# Altium PCB PCB_Project_Board_2.PcbDoc
Units mil, origin at the board's own origin, x right, y up, seen from the top; angles counter-clockwise.
Board outline 3900 x 3905 mil, 2 copper layers (Top Layer, Bottom Layer); 46 components, 29 nets, 148 pads, 20 vias.
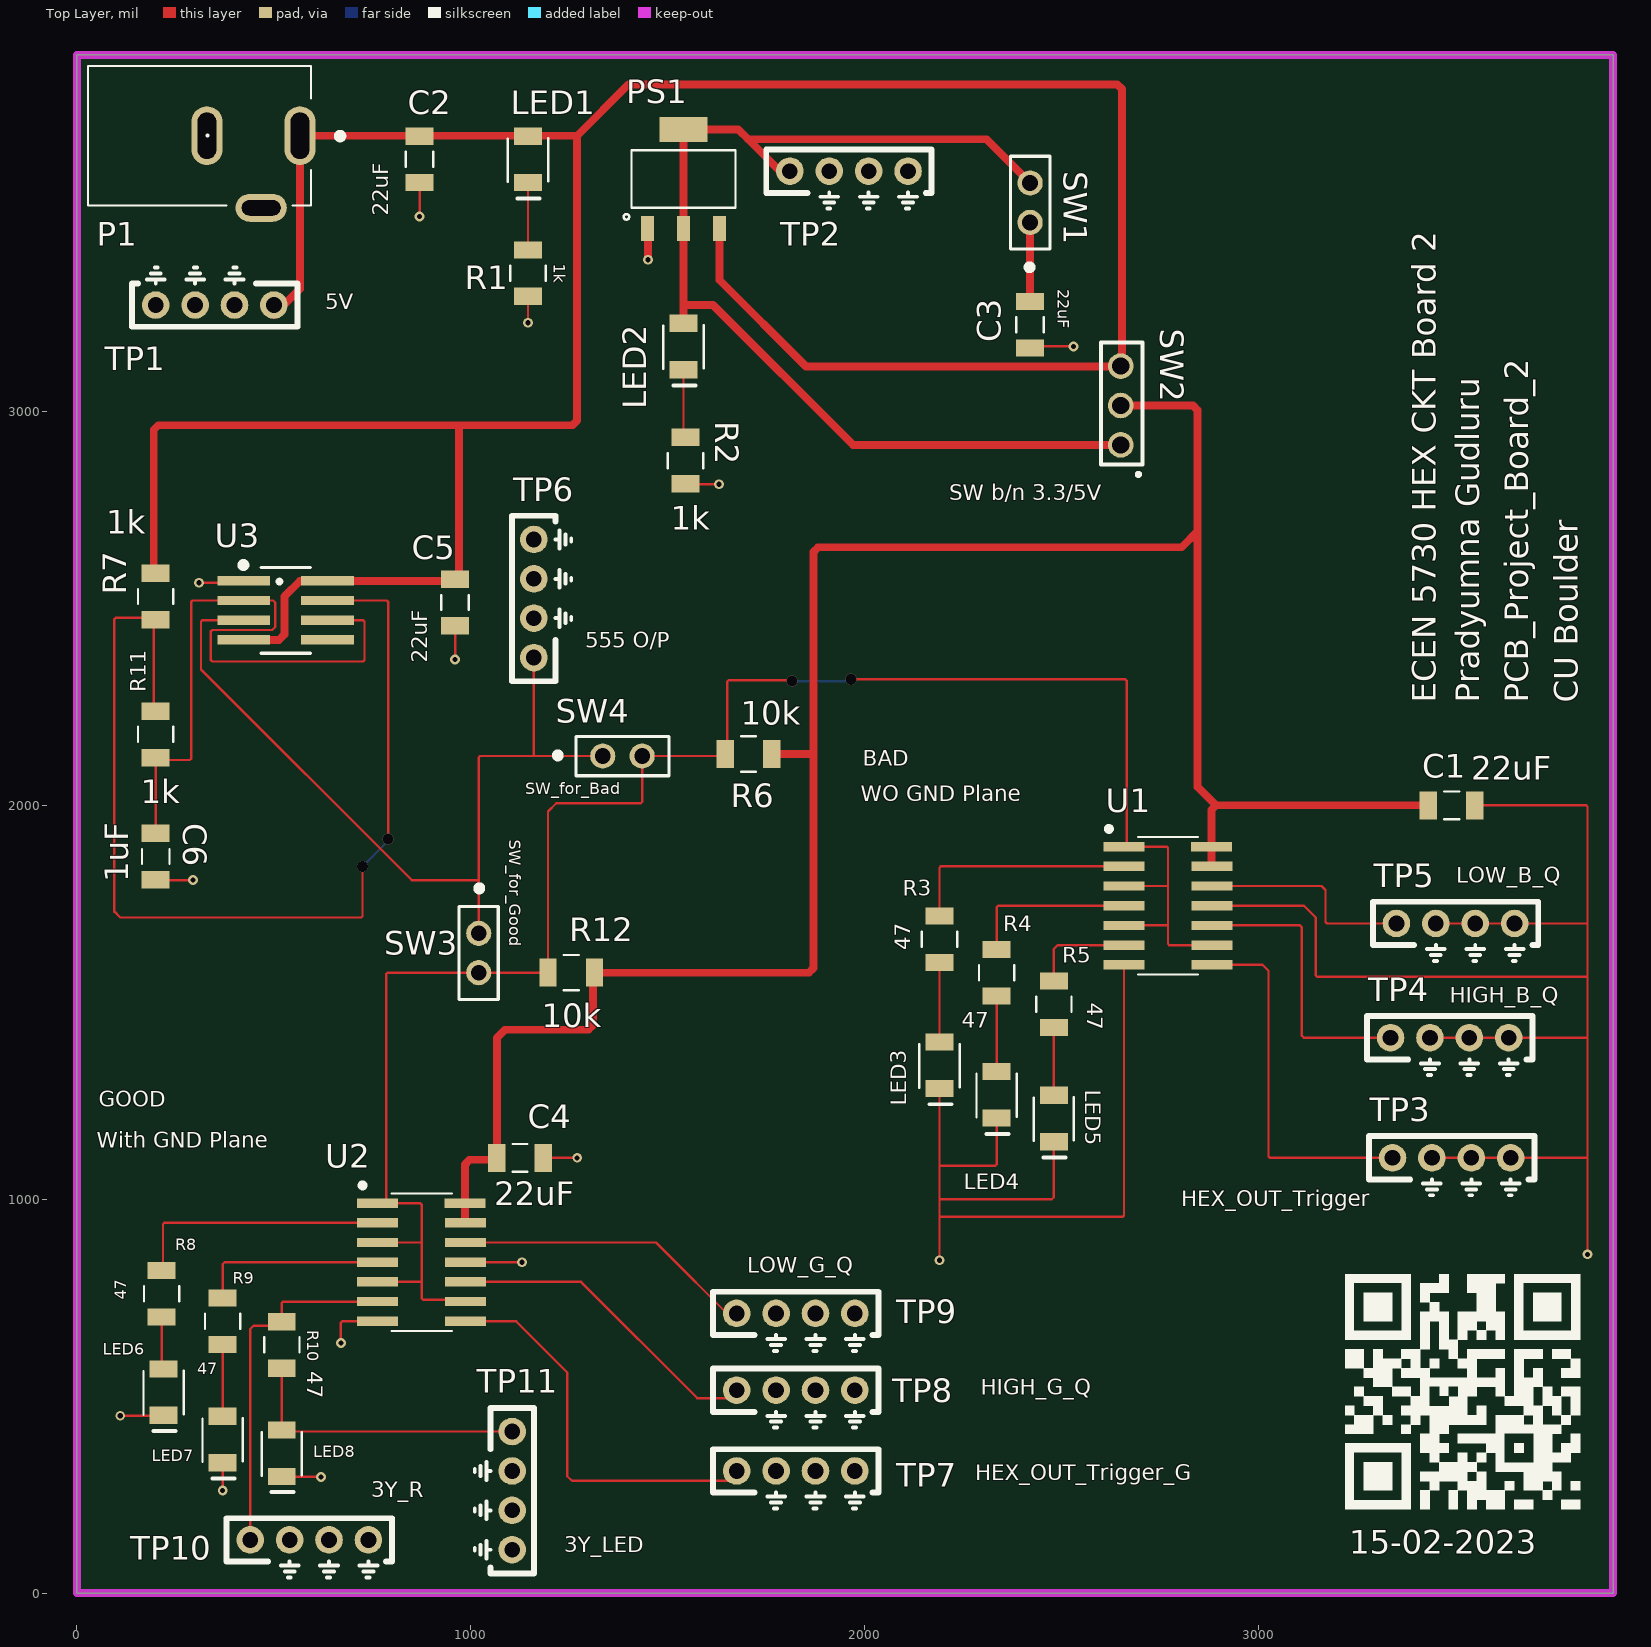
[diagram p0: Top Layer view]
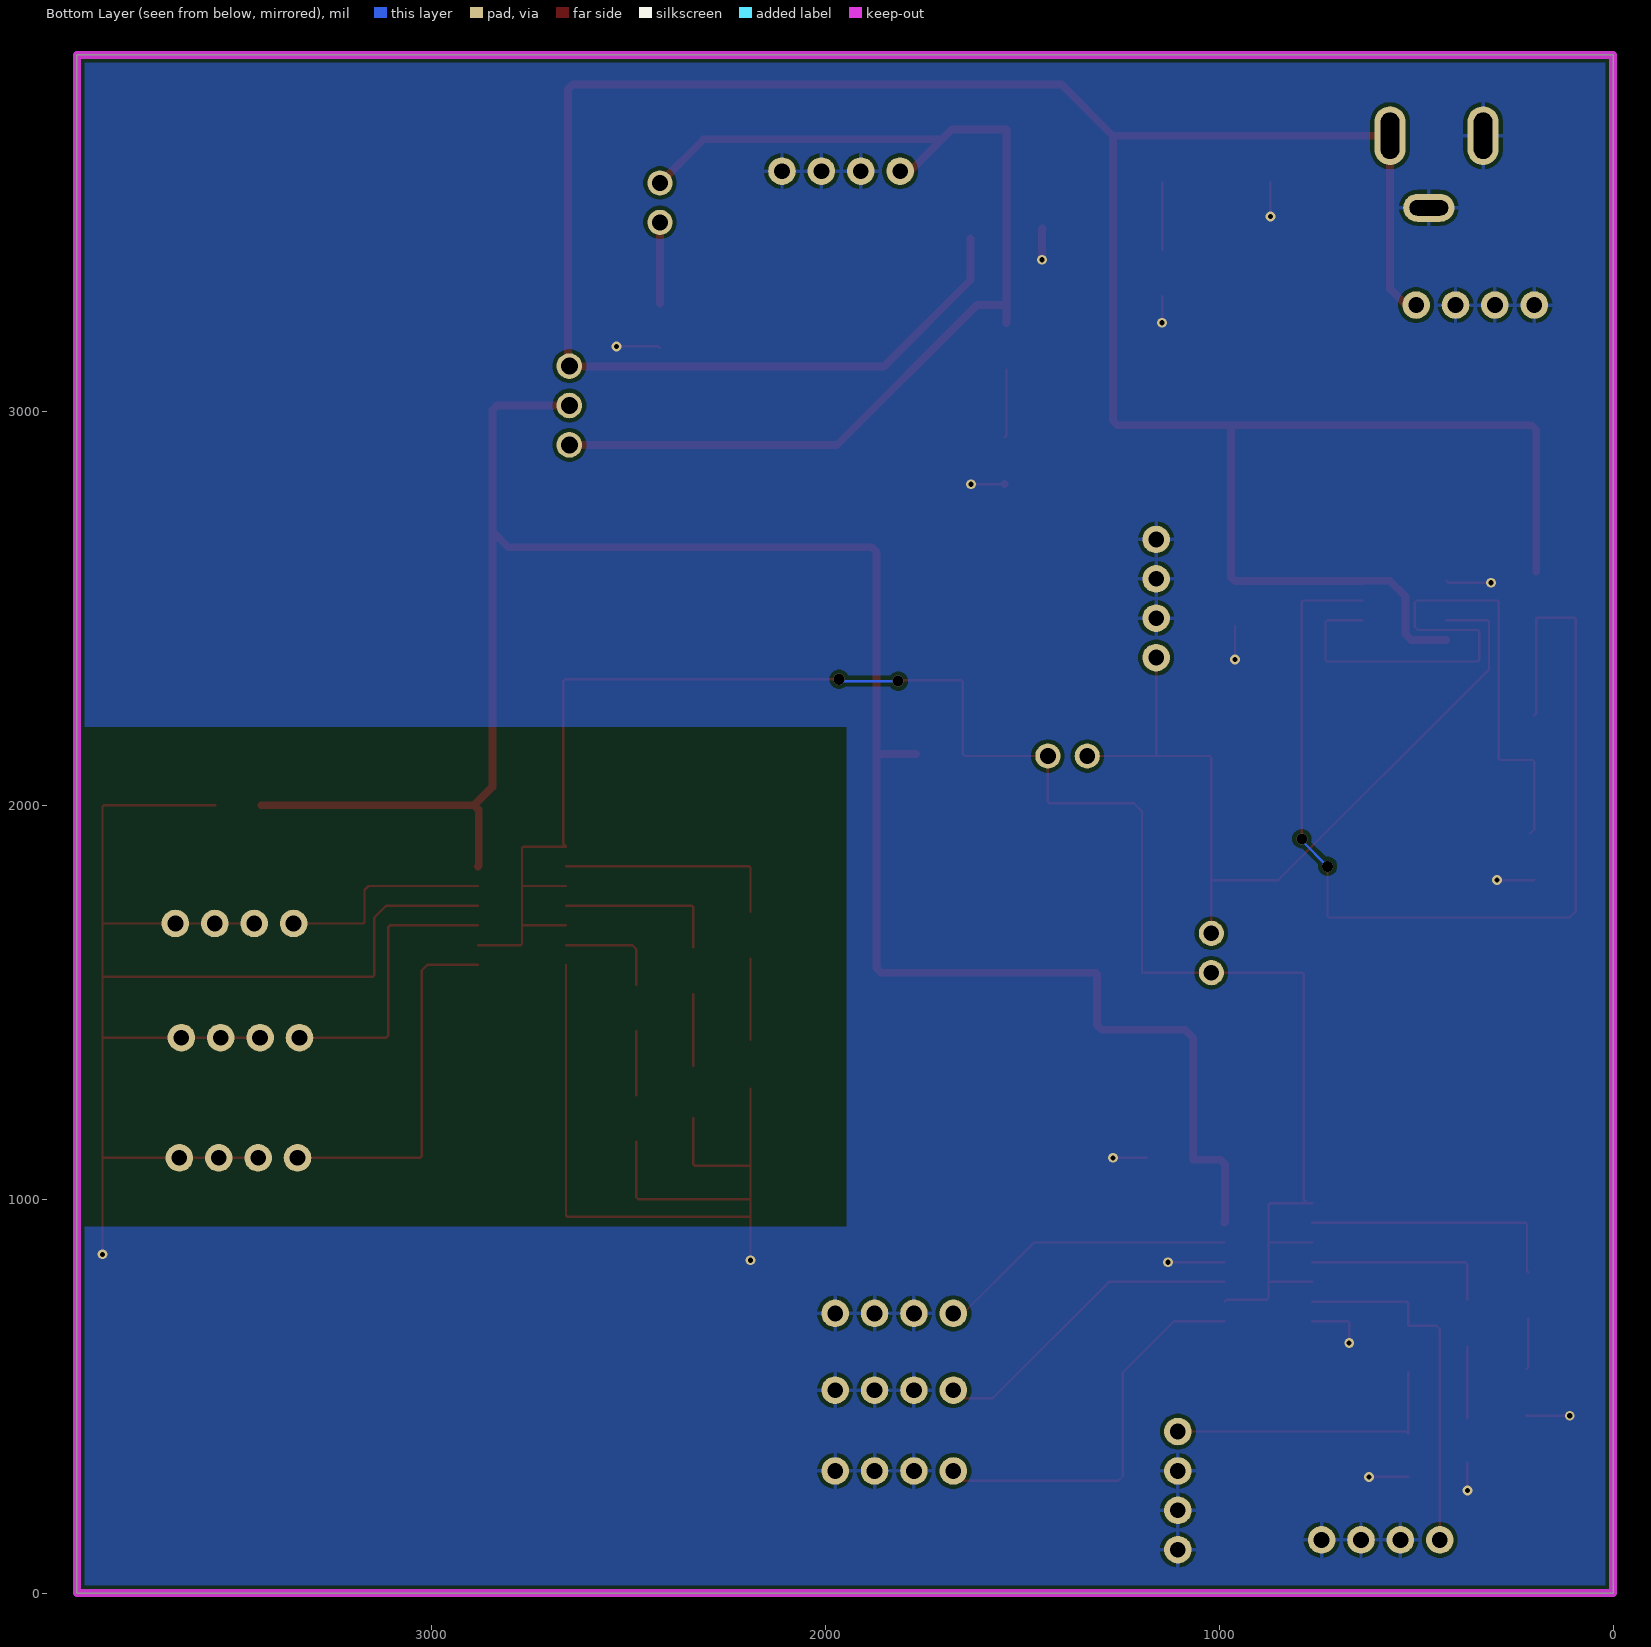
[diagram p1: Bottom Layer view, seen from below]
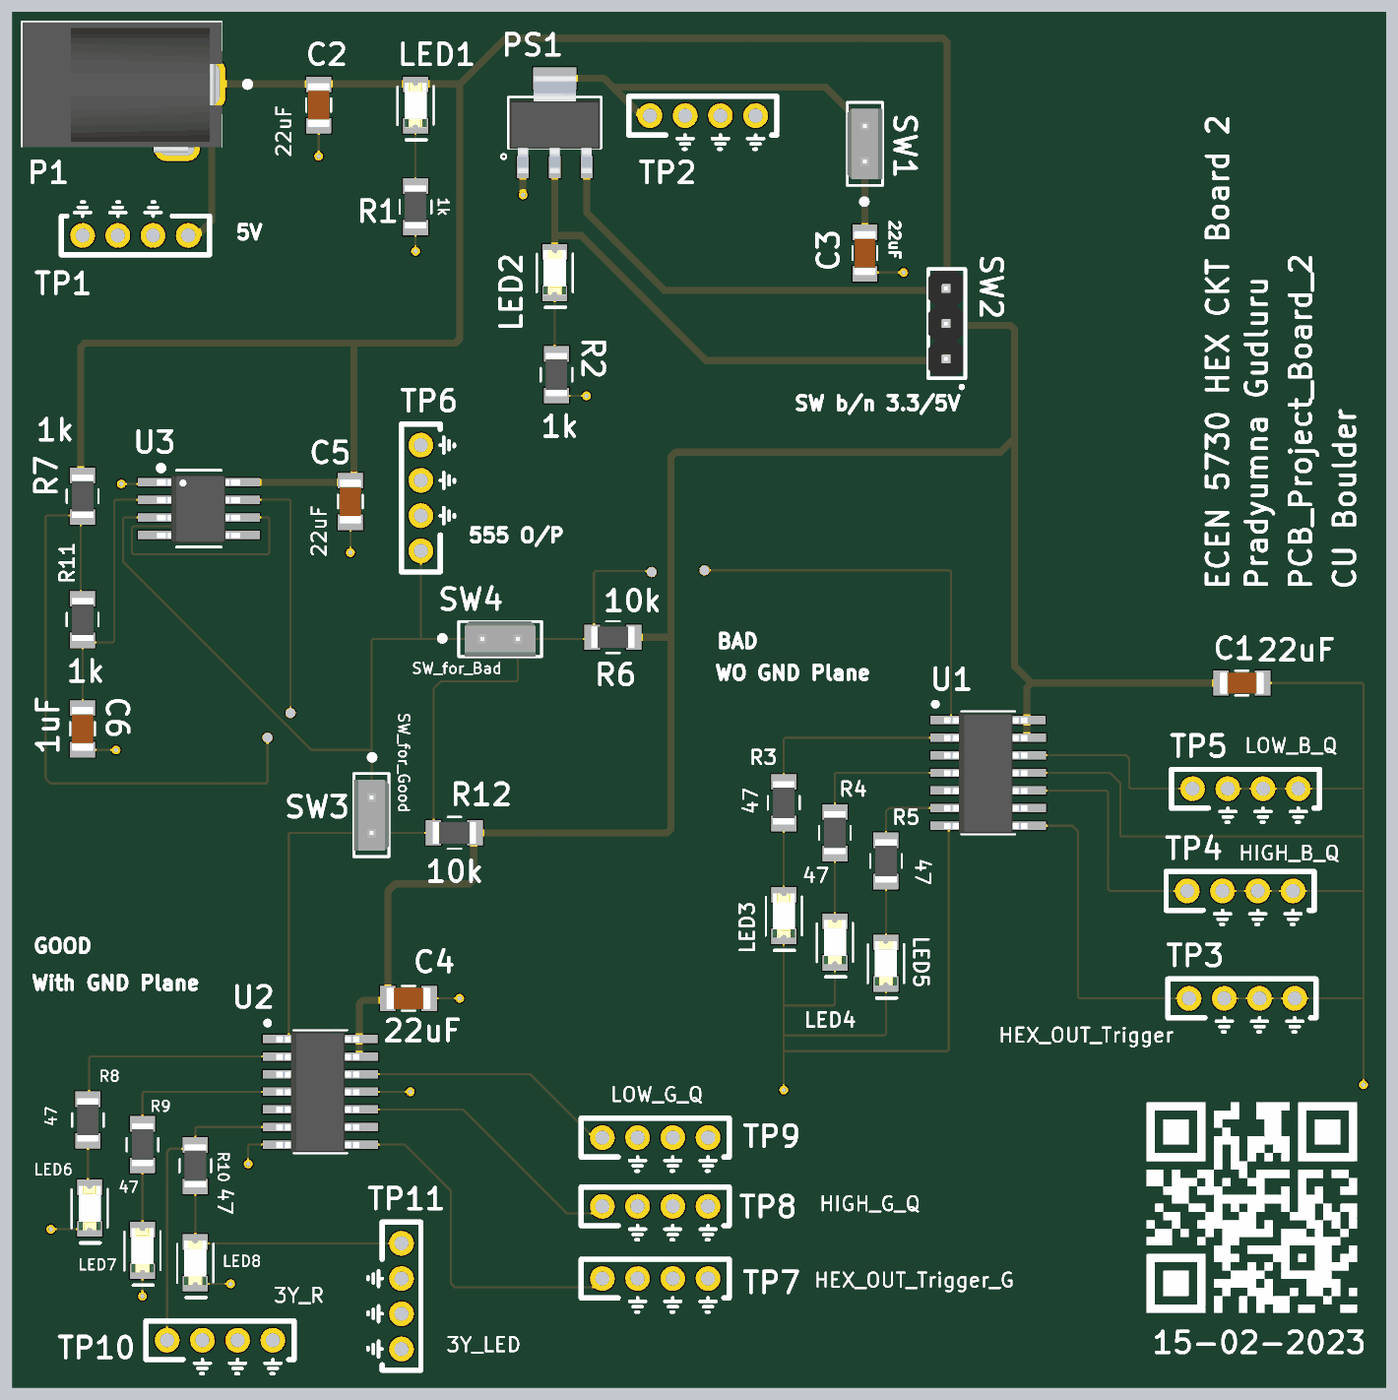
[diagram p2: 3D render of the assembled board from above, using the file's embedded part models]

## Layer stack, top to bottom
Top Solder: solder mask 0.4, Solder Resist, Dk 3.5
Top Layer: signal copper 1.4
Dielectric 1: dielectric 12.6, FR-4, Dk 4.8
Bottom Layer: signal copper 1.4
Bottom Solder: solder mask 0.4, Solder Resist, Dk 3.5

## Board outline
0,0 3900,0 3900,3905 0,3905

## Design rules (kind name [scope] priority, off if disabled: settings)
BoardOutlineClearance [All] p1: gap=10 ignorepadtopadclearanceinfootprint=FALSE
Clearance [All] p1: gap=10 ignorepadtopadclearanceinfootprint=FALSE except(0: Arc-Hole Track-Hole SMDPad-Hole THPad-Hole Via-Hole Fill-Hole Poly-Hole Region-Hole Text-Hole)
PlaneClearance [All] p1: clearance=10
PolygonConnect [All] p1: thpad.connectstyle=Relief thpad.reliefconductorwidth=10 thpad.reliefentries=4 thpad.polygonreliefangle="90 Angle" thpad.airgapwidth=10 smdpad.connectstyle=Direct smdpad.reliefconductorwidth=10 smdpad.reliefentries=4 smdpad.polygonreliefangle="90 Angle" smdpad.airgapwidth=10 via.connectstyle=Direct via.reliefconductorwidth=10 via.reliefentries=4 via.polygonreliefangle="90 Angle" via.airgapwidth=10
RoutingVias [All] p1: holewidth=13 width=25 viastyle="Through Hole" minholewidth=13 minwidth=25 maxholewidth=60 maxwidth=80
SolderMaskExpansion [All] p1: expansion=4 istentingtop=FALSE
Width "Schematic Width Constraint" [InNet('+5')] p1: maxlimit=100 minlimit=10 preferedwidth=20 minimp=50.000000 maximp=50.000000 favimp=50.000000
Width [All] p2: maxlimit=100 minlimit=6 preferedwidth=6 minimp=50.000000 maximp=50.000000 favimp=50.000000
29 further rules are at their usual default settings.

## Components (designator, comment, footprint, x,y, rotation, side; value= is the part's Value field where it differs from the comment)
C1 "22uF" 1206_Passive_Capacitor 3490,2000 r0 top
C2 "22uF" 1206_Passive_Capacitor 870,3640 r90 top
C3 "22uF" 1206_Passive_Capacitor 2420,3220 r90 top
C4 "22uF" 1206_Passive_Capacitor 1125,1105 r0 top
C5 "22uF" 1206_Passive_Capacitor 960,2515 r90 top
C6 "1uF" 1206_Passive_Capacitor 200,1870 r90 top
LED1 "Green" LED_1206 1145,3640 r270 top
LED2 "Blue" LED_1206 1540,3165 r270 top
LED3 "Green" LED_1206 2190,1340 r270 top
LED4 "Green" LED_1206 2335,1265 r270 top
LED5 "Green" LED_1206 2480,1205 r270 top
LED6 "Green" LED_1206 220,510 r270 top
LED7 "Green" LED_1206 370,390 r270 top
LED8 "Green" LED_1206 520,355 r270 top
P1 "Power Jack" Power_Jack 566.22,3700 r180 top value="CONN PWR JACK 2X5.5MM SOLDER"
PS1 "AMS1117-3.3" LDO 1540,3590 r0 top value="IC REG LINEAR 3.3V 800MA SOT223"
R1 "1k" 1206_Passive_Resitor 1145,3351 r90 top value="1K Ohm"
R2 "1k" 1206_Passive_Resitor 1545,2875 r90 top value="1K Ohm"
R3 "47" 1206_Passive_Resitor 2190,1660 r90 top value=47Ohm
R4 "47" 1206_Passive_Resitor 2335,1575 r90 top value=47Ohm
R5 "47" 1206_Passive_Resitor 2480,1495 r90 top value=47Ohm
R6 "10k" 1206_Passive_Resitor 1705,2130 r180 top value=10KOhm
R7 "1k" 1206_Passive_Resitor 200,2530 r90 top value="1K Ohm"
R8 "47" 1206_Passive_Resitor 215,760 r90 top value=47Ohm
R9 "47" 1206_Passive_Resitor 370,690 r90 top value=47Ohm
R10 "47" 1206_Passive_Resitor 520,630 r90 top value=47Ohm
R11 "1k" 1206_Passive_Resitor 200,2180 r90 top value="1K Ohm"
R12 "10k" 1206_Passive_Resitor 1255,1575 r180 top value=10KOhm
SW1 "SW_Test_DC" 2Pin-Header-Conn 2420,3480 r90 top
SW2 "PREC003SAAN-RC" 3_PIN_100mil 2650,2915 r90 top value="CONN HEADER VERT 3POS 2.54MM"
SW3 "SW_for_Good" 2Pin-Header-Conn 1020,1675 r270 top
SW4 "SW_for_Bad" 2Pin-Header-Conn 1335,2125 r0 top
TP1 "TP_5V" TP10x_Probe 350,3270 r180 top
TP2 "TP_3.3V" TP10x_Probe 1960,3610 r0 top
TP3 "HEX_OUT_Trigger" TP10x_Probe 3490,1105 r0 top
TP4 "HIGH_B_Q" TP10x_Probe 3485,1410 r0 top
TP5 "LOW_B_Q" TP10x_Probe 3500,1700 r0 top
TP6 "TP_555_Output" TP10x_Probe 1160,2525 r90 top
TP7 "HEX_OUT_Trigger_G" TP10x_Probe 1825,310 r0 top
TP8 "HIGH_G_Q" TP10x_Probe 1825,515 r0 top
TP9 "LOW_G_Q" TP10x_Probe 1825,710 r0 top
TP10 "3Y_R" TP10x_Probe 590,135 r0 top
TP11 "3Y_LED" TP10x_Probe 1105,260 r270 top
U1 "SN74AHC14DR" HEX_74AC14 2770,1745 r0 top
U2 "SN74AHC14DR" HEX_74AC14 875,840 r0 top
U3 "LMC555CMX/NOPB" TS555IDTTR 530,2495 r0 top

## Footprints (in the part's own frame and the unit in brackets; to place one, negate y for a bottom-side part, rotate by r counter-clockwise, add the part's x,y. Pads: shape width x height; smd on the part's side, far side on the other; paste and mask are expansions set on the pad)
2Pin-Header-Conn [mm]
  round 1.62 hole 1.02: 1(0,0) 2(2.54,0)
  silkscreen extent -3.03,-1.27 4.26,1.26, body extent -1.27,-1.27 3.81,1.27, height 8.13
3_PIN_100mil [mm]
  round 1.65 hole 1.1: 1(0,0) 2(2.54,0) 3(5.08,0)
  silkscreen extent -2,-1.4 6.6,1.27, body extent -1.14,-1.27 6.48,1.27, height 8.38
1206_Passive_Capacitor [mil]
  rect 44x71 smd: 1(-59,0) 2(59,0)
  silkscreen extent -19,-35 19,35, body extent -63,-31 63,32, height 50
1206_Passive_Resitor [mil]
  rect 44x71 smd: 1(-59,0) 2(59,0)
  silkscreen extent -19,-45 19,45, body extent -61,-31 61,31, height 26
HEX_74AC14 [mm]
  rect 2.65x0.6 smd: 1(-2.836,3.81) 2(-2.836,2.54) 3(-2.836,1.27) 4(-2.836,0) 5(-2.836,-1.27) 6(-2.836,-2.54) 7(-2.836,-3.81) 8(2.836,-3.81) 9(2.836,-2.54) 10(2.836,-1.27) 11(2.836,0) 12(2.836,1.27) 13(2.836,2.54) 14(2.794,3.81)
  silkscreen extent -3.94,-4.43 1.95,5.08, body extent -3.18,-4.35 2.82,4.3, height 1.75
LDO [mil]
  rect 33x63 smd: 1(-91,-126) 2(0,-126) 3(91,-126)
  rect 122x63 smd: 4(0,126)
  silkscreen extent -152,-103 132,73, body extent -128,-144 128,132, height 73
LED_1206 [mil]
  rect 44x71 smd: 1(-59,0) 2(59,0)
  silkscreen extent -54,-51 99,51, body extent -63,-31 63,31, height 28
Power_Jack [mm]
  oval 2x3.8 hole 1.2 slot 3 at 90 deg: 1(0,0) 2(6,0)
  oval 3.3x1.8 hole 1 slot 2.5 at 0 deg: 3(2.5,4.65)
  silkscreen extent -2.79,-4.5 13.68,4.5, body extent -0.76,-4.45 13.64,4.95, height 11.49
TP10x_Probe [mil] "Small Probs footprint"
  round 70 hole 40: 1(-150,0) 2(-50,0) 2(50,0) 2(150,0)
  silkscreen extent -210,-95 210,55
TS555IDTTR [mm] "IC OSC Single Timer 2.7MHz 8SOIC"
  rect 3.4x0.6 smd: 1(-2.7,1.905) 2(-2.7,0.635) 3(-2.7,-0.635) 4(-2.7,-1.905) 5(2.7,-1.905) 6(2.7,-0.635) 7(2.7,0.635) 8(2.7,1.905)
  silkscreen extent -2.85,-2.77 1.6,3.05, body extent -3.03,-2.48 2.96,2.43, height 1.75

## Part data
C1 C2 C3 C4 C5: library part C_22uF_1206, "22uF ±10% 25V X5R 1206 Multilayer Ceramic Capacitors MLCC - SMD/SMT RoHS", LCSC Part#=C12891, MFR Part #=CL31A226KAHNNNE, Datasheet=https://datasheet.lcsc.com/lcsc/1811031514_Samsung-Electro-Mechanics-CL31A226KAHNNNE_C12891.pdf, Type=basic
C6: library part C_1uF_1206, "MULTILAYER CERAMIC CAPACITORS MLCC - SMD/SMT 1UF 50V 1206 ROHS", LCSC Part#=C1848, MFR Part #=CL31B105KBHNNNE, Digikey Link=https://www.digikey.com/product-detail/en/C1206C105M4RACTU/399-8150-1-ND/3471873/?itemSeq=304982366, Type=Basic
LED1 LED3 LED4 LED5 LED6 LED7 LED8: library part LED_GREEN_1206, "Green 513~528nm 1206 Light Emitting Diodes (LED) RoHS", LCSC Part#=C434439, MFR Part #=SZYY1206G, Datasheet=https://datasheet.lcsc.com/lcsc/2006301532_Yongyu-Photoelectric-SZYY1206G_C434439.pdf, Type=Extended
LED2: library part LED_BLUE_1206, "blue 1206  Light Emitting Diodes (LED) ROHS", LCSC Part#=C130717, MFR Part #=NCD1206B1, Datasheet=https://datasheet.lcsc.com/lcsc/2008201033_Foshan-NationStar-Optoelectronics-NCD1206B1_C130717.pdf, Type=Extended
P1: library part "P_Power Jack", "Power Barrel Connector Jack 2.10mm ID (0.083\"), 5.50mm OD (0.217\") Through Hole, Right Angle", LCSC Part#=C136744, MFR Part #=PJ-102A, Digikey Link=https://www.digikey.com/product-detail/en/PJ-102A/CP-102A-ND/275425/?itemSeq=304982367, Type=Extended
PS1: library part PS_AMS_LDO_3v3, "LOW DROPOUT REGULATORS(LDO) POSITIVE FIXED 1.3V @ 800MA 15V 3.3V 1A SOT-223 ROHS", LCSC Part#=C6186, MFR Part #=AMS1117-3.3, Type=Basic
R1 R2 R7 R11: library part R_1K_1206, "CHIP RESISTOR - SURFACE MOUNT 1KOHMS ±1% 1/4W 1206 ROHS", LCSC Part#=C4410, MFR Part #=RNCP1206FTD1K00CT, Digikey Link=https://www.digikey.com/product-detail/en/RNCP1206FTD1K00/RNCP1206FTD1K00CT-ND/2240675/?itemSeq=304982373, Type=Basic
R3 R4 R5 R8 R9 R10: library part R_47Ohm_1206, "47Ω ±5% 0.25W ±200ppm/℃ 1206 Chip Resistor - Surface Mount RoHS", LCSC Part#=C25384, MFR Part #=1206W4J0470T5E, Datasheet=https://datasheet.lcsc.com/lcsc/1811101020_UNI-ROYAL-Uniroyal-Elec-1206W4J0470T5E_C25384.pdf, Type=Extended
R6 R12: library part R_10KOhm_1206, "10 kOhms ±5% 0.25W, 1/4W Chip Resistor 1206 (3216 Metric) Automotive AEC-Q200 Thick Film", LCSC Part#=C17902, MFR Part #=RMCF1206FT10K0, Digikey Link=https://www.digikey.com/en/products/detail/stackpole-electronics-inc/RMCF1206FT10K0/1759669, Type=Basic
SW1 SW3 SW4: library part SW_2Pin_100mil_Switch, "2Pin Header", LCSC Part#=C124375, Type=Extended
SW2: library part SW_3Pin_100mil_Switch, "Connector Header Through Hole 3 position 0.100\" (2.54mm)", LCSC Part#=C49257, Digikey Link=https://www.digikey.com/product-detail/en/PREC003SAAN-RC/S1012EC-03-ND/2774851/?itemSeq=304982371, MFR Part #=PREC003SAAN-RC, Type=Extended
TP1 TP2 TP3 TP4 TP5 TP6 TP7 TP8 TP9 TP10 TP11: library part TP_10x_Probe, "Test Point 300 mil centers"
U1 U2: library part U_74_AHC_Hex, "Inverter IC 6 Channel Schmitt Trigger 14-SOIC", LCSC Part#=C6942, Datasheet=https://datasheet.lcsc.com/szlcsc/ON-Semicon-ON-74AC14SCX_C5482.pdf, MFR Part #=SN74AHC14DR, Type=Extended
U3: library part U_555_Fast, "555 Type, Timer/Oscillator _Single_ IC 3MHz 8-SO", LCSC Part#=C90760, Package=SOIC-8, Digikey Link=https://www.digikey.com/product-detail/en/texas-instruments/LMC555CMX-NOPB/LMC555CMX-NOPBCT-ND/1010550, MFR Part #=LMC555CMX/NOPB, Type=Extended

## Via types
v1: diameter 25, hole 13, Top Layer to Bottom Layer, 16 vias
v2: diameter 28, hole 28, Top Layer to Bottom Layer, 4 vias

## Nets (pads, with @x,y where several pads share a name; then routed paths per layer and width w, separated by ;. In a path a pad name is that pad's centre, name@x,y a point inside that pad or via, vN(x,y) a via of type N, cw(c..) or ccw(c..) an arc to the next point about the centre after c; other vN are vias at no path point)
1A: R6.2 R12.2 SW3.2 SW4.2 U1.1 U1.3 U1.5 U1.9 U2.1 U2.3 U2.5 U2.9 | length 4996.5
  Top Layer w6: U2.5 875,790 ; U2.3 875,890 ; U2.1 U2.1@776.19,990 ; U2.9 981.65,745 878.51,745 875,748.51 875,790 ; R12.2@1191,1575 SW3.2 788.51,1575 785,1571.49 785,998.81 U2.1@776.19,990 ; R12.2 1196,1984 1217,2005 1431.49,2005 1435,2008.51 SW4.2 1646,2125 1651,2130 1651,2314 1654.51,2317.51 1812.49,2317.51 v2(1815,2315) ; v2(1965,2320) 2661.49,2320 2665,2316.49 2665,1901.65 U1.1 2766.49,1895 2770,1891.49 2770,1795 ; U1.5 2770,1695 ; U1.3 2770,1795 ; U1.9 2773.51,1645 2770,1648.51 2770,1695 ; U2.1@776.19,990 871.49,990 875,986.49 875,890 ; 875,790 875,890 ; 2770,1695 2770,1795
  Bottom Layer w6: v2(1815,2315) 1961.49,2315 1965,2318.51 v2(1965,2320)
3.3V: LED2.1 PS1.2 PS1.4 SW1.2 SW2.1 TP2.1 | length 2840.3
  Top Layer w20: LED2.1 1540,3270 ; TP2.1@1810,3585 1704,3691 ; SW1.2 2309,3691 1704,3691 ; SW2.1@2655,2915 1970,2915 1615,3270 1540,3270 ; 1540,3270 PS1.2 PS1.4 1679,3716 1704,3691
5A: C1.2 C2.1 C3.1 C4.2 C5.1 C6.1 LED3.2 LED4.2 LED5.2 LED6.2 LED7.2 LED8.2 P1.2 P1.3 PS1.1 R1.1 R2.1 TP1.2 TP2.2 TP3.2 TP4.2 TP5.2 TP6.2 TP7.2 TP8.2 TP9.2 TP10.2 TP11.2 U1.7 U1.11 U2.7 U2.11 U3.1 | length 7331.1
  Top Layer w6: v1(110,450) 219,450 LED6.2 ; C6.1 201,1810 v1(295,1810) ; v1(310,2565) 418.7,2565 U3.1 ; v1(370,260) LED7.2 ; LED8.2 521,295 v1(620,295) ; v1(670,635) 670,686.49 673.51,690 U2.7 ; v1(870,3495) C2.1 ; v1(960,2370) C5.1 ; U2.11 v1(1130,840) ; v1(1145,3225) R1.1 ; C4.2 v1(1270,1105) ; R2.1@1545.5,2815.5 v1@1629.5,2815.5 ; v1(2190,845) 2190,955 ; LED3.2 2190,1085 ; LED4.2 2335,1088.51 2331.49,1085 2190,1085 ; C3.1 2424,3165 v1(2530,3165) ; LED5.2 2480,1005 2475,1000 2190,1000 ; U1.7 2658.35,958.51 2654.83,955 2190,955 ; U1.11 3115,1745 3145,1715 3145,1568.51 3148.51,1565 3835,1565 ; TP4.2@3435,1410 3535,1410 3635,1410 3835,1410 ; TP3.2@3440,1105 3540,1105 3640,1105 3835,1105 ; TP5.2@3450,1700 3550,1700 3650,1700 3835,1700 ; C1.2 3831.49,2000 3835,1996.49 3835,1700 ; v1@3835,870 3835,1105 ; 2190,955 2190,1000 ; 2190,1000 2190,1085 ; 3835,1105 3835,1410 ; 3835,1410 3835,1565 ; 3835,1565 3835,1700
  Top Layer w20: PS1.1 1449.5,3463.5 1449.5,3385.5 v1(1450,3385) ; R2.1 R2.1@1545.5,2815.5 ; v1@1629.5,2815.5 v1(1630,2815)
  other v1: 3835,860
6A: C1.1 C4.1 R6.1 R12.1 SW2.2 U1.13 U1.14 U2.13 U2.14 | length 5563.6
  Top Layer w20: U2.13 985,941.65 U2.14 985,1088.28 996.72,1100 C4.1@1066,1100 ; C4.1 1066,1409.28 1086.72,1430 1298.28,1430 1310,1441.72 1310,1571 R12.1 1858.28,1575 1870,1586.72 1870,2130 ; R6.1@1769,2130 1870,2130 ; SW2.2@2655,3015 2833.28,3015 2845,3003.28 2845,2695 ; U1.13 2880,1846.65 U1.14 2880,1988.28 2891.72,2000 ; C1.1 2891.72,2000 ; 1870,2130 1870,2643.28 1881.72,2655 2805,2655 2845,2695 ; 2845,2695 2845,2046.72 2891.72,2000
555_Output: SW3.1 SW4.1 TP6.1 U3.3 | length 2171.2
  Top Layer w6: U3.3 318.51,2470 315,2466.49 315,2345 850,1810 1020,1810 ; SW3.1 1020,1810 ; TP6.1 1160,2125 ; SW4.1 1160,2125 ; 1020,1810 1020,2121.49 1023.51,2125 1160,2125
+5: C2.2 C5.2 LED1.1 P1.1 PS1.3 R7.2 SW2.3 TP1.1 U3.4 U3.8 | length 7767.5
  Top Layer w20: R7.2@195,2594 195,2953.28 206.72,2965 970,2965 ; U3.4 513.28,2420 526.63,2433.35 526.63,2529.91 566.72,2570 U3.8 636.8,2569.5 959.5,2569.5 960,2569 970,2579 970,2965 ; TP1.1@500,3245 566.22,3311.22 P1.1 870,3700 1145,3700 1270,3700 ; PS1.3@1631,3439 1631,3334 1851,3114 2654,3114 SW2.3@2655,3115 ; SW2.3@2660,3125 2653.02,3131.98 2653.02,3818.28 2641.3,3830 1400,3830 1270,3700 ; 970,2965 1258.28,2965 1270,2976.72 1270,3700
NetC3_2: C3.2 SW1.1 | length 206
  Top Layer w20: C3.2@2420,3274 SW1.1
NetC6_2: C6.2 R11.1 U3.2 U3.6 | length 1783.8
  Top Layer w6: C6.2@210,1929 200,1939 200,2111 204,2115 286.49,2115 290,2118.51 290,2516.49 293.51,2520 U3.2 498.49,2520 503.63,2514.86 503.63,2452.8 495.83,2445 343.51,2445 340,2441.49 340,2368.51 343.51,2365 726.49,2365 730,2368.51 730,2466.49 726.49,2470 U3.6
NetLED1_2: LED1.2 R1.2 | length 171
  Top Layer w6: R1.2 LED1.2
NetLED2_2: LED2.2 R2.2 | length 174.1
  Top Layer w6: LED2.2 1540,2939 R2.2
NetLED3_1: LED3.1 R3.1 | length 207
  Top Layer w6: LED3.1@2190,1404 R3.1@2190,1611
NetLED4_1: LED4.1 R4.1 | length 182
  Top Layer w6: LED4.1@2335,1339 R4.1@2335,1521
NetLED5_1: LED5.1 R5.1 | length 162
  Top Layer w6: LED5.1 R5.1@2480,1426
NetLED6_1: LED6.1 R8.1 | length 129.1
  Top Layer w6: R8.1@215,696 215,574 LED6.1
NetLED7_1: LED7.1 R9.1 | length 182
  Top Layer w6: LED7.1@370,444 R9.1@370,626
NetLED8_1: LED8.1 R10.1 TP11.1 | length 744.2
  Top Layer w6: R10.1@520,560.68 520,404 526,410 TP11.1
NetR3_2: R3.2 U1.2 | length 582.3
  Top Layer w6: R3.2@2190,1729 2190,1841.49 2193.51,1845 U1.2
NetR4_2: R4.2 U1.4 | length 427.3
  Top Layer w6: R4.2@2335,1639 2335,1741.49 2338.51,1745 U1.4
NetR5_2: R5.2 U1.6 | length 273.5
  Top Layer w6: R5.2@2480,1544 2480,1635 2490,1645 U1.6
NetR7_1: R7.1 R11.2 U3.7 | length 2710.7
  Top Layer w6: R11.2@200,2229 195,2234 195,2476 98.51,2476 95,2472.49 95,1730 110,1715 721.49,1715 725,1718.51 v2(725,1845) ; U3.7 786.49,2520 790,2516.49 v2(790,1915)
  Bottom Layer w6: v2(725,1845) 790,1910 v2(790,1915)
NetR8_2: R8.2 U2.2 | length 670.2
  Top Layer w6: R8.2@215,814 218.49,817.49 218.49,936.49 222,940 U2.2
NetR9_2: R9.2 U2.4 | length 486.4
  Top Layer w6: R9.2@370,744 370,835 375,840 U2.4
NetR10_2: R10.2 TP10.1 U2.6 | length 931.3
  Top Layer w6: TP10.1@440,125 440,670.17 448.51,678.68 520,678.68 520,736.49 523.51,740 U2.6
NetTP3_1: TP3.1 U1.8 | length 937.5
  Top Layer w6: U1.8 3010,1595 3025,1580 3025,1108.51 3028.51,1105 TP3.1
NetTP4_1: TP4.1 U1.10 | length 732.5
  Top Layer w6: U1.10 3105,1695 3110,1690 3110,1415 3115,1410 TP4.1
NetTP5_1: TP5.1 U1.12 | length 555.4
  Top Layer w6: U1.12 3160,1795 3170,1785 3170,1703.51 3173.51,1700 TP5.1
NetTP7_1: TP7.1 U2.8 | length 1010.3
  Top Layer w6: U2.8 1115,690 1245,560 1245,296.72 1256.72,285 TP7.1@1675,285
NetTP8_1: TP8.1 U2.10 | length 812.6
  Top Layer w6: U2.10 1280,790 1575,495 1670,495 TP8.1@1675,490
NetTP9_1: TP9.1 U2.12 | length 773.3
  Top Layer w6: U2.12 1470,890 TP9.1@1675,685
pads on no net: U3.5

## Polygon pours and split planes (outlines as drawn)
5A on Bottom Layer "NONET_L-01_P-001" (solid, pour order 1): 15,3900 3890,3900 3900,3890 3890,3880 3890,2200 1945,2200 1945,930 3895,930 3900,925 3900,-10 0,-10 0,3895

## Keep-outs
Keep-Out Layer:
  the board outline again, w20

## Silkscreen, mask and mechanical layers (free items; w line width, h text height)
Top Overlay:
  drawing of 37 lines, arcs and shapes, not listed
  text "5V" at 630,3260 h40
  text "SW b/n 3.3/5V" at 2215,2775 h40
  text "555 O/P" at 1290,2400 h40
  text "ECEN 5730 HEX CKT Board 2" at 3450,2260 h60 r90
  text "Pradyumna Gudluru" at 3560.01,2260 h60 r90
  text "PCB_Project_Board_2" at 3685.01,2260 h60 r90
  text "CU Boulder" at 3810,2260 h60 r90
  text "BAD" at 1995,2100 h40
  text "WO GND Plane" at 1990,2010 h40
  text "GOOD" at 55,1235 h40
  text "With GND Plane" at 50,1130 h40
  text "15-02-2023" at 3230,100 h60